# Altium PCB PCB_UAV_ESP32.pcbdoc
Units mm, origin at the board's own origin, x right, y up, seen from the top; angles counter-clockwise.
Board outline 81.53 x 88.63 mm, 2 copper layers (Top Layer, Bottom Layer); 49 components, 38 nets, 209 pads, 132 vias.
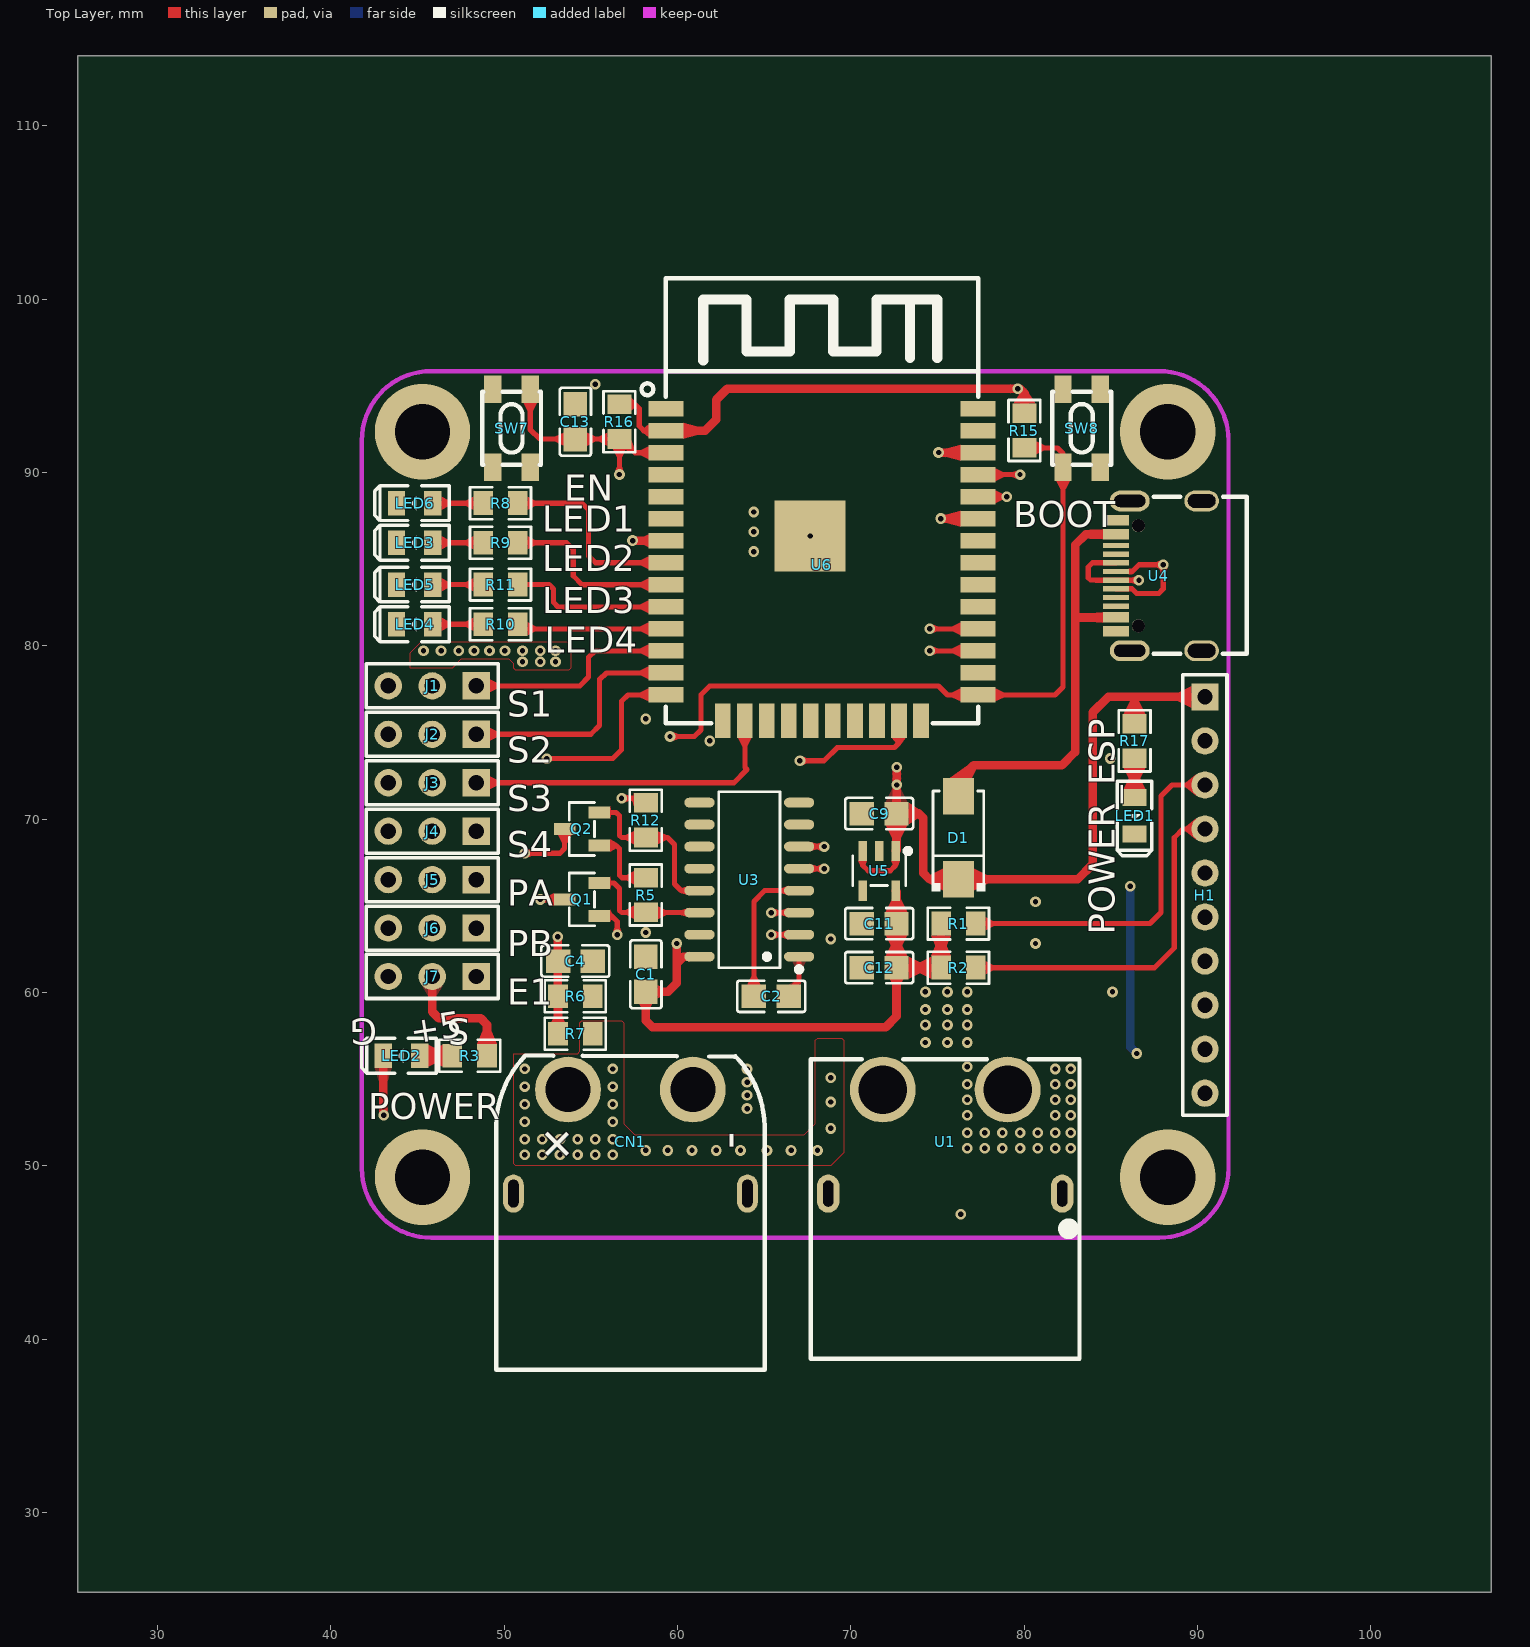
[diagram p0: Top Layer view]
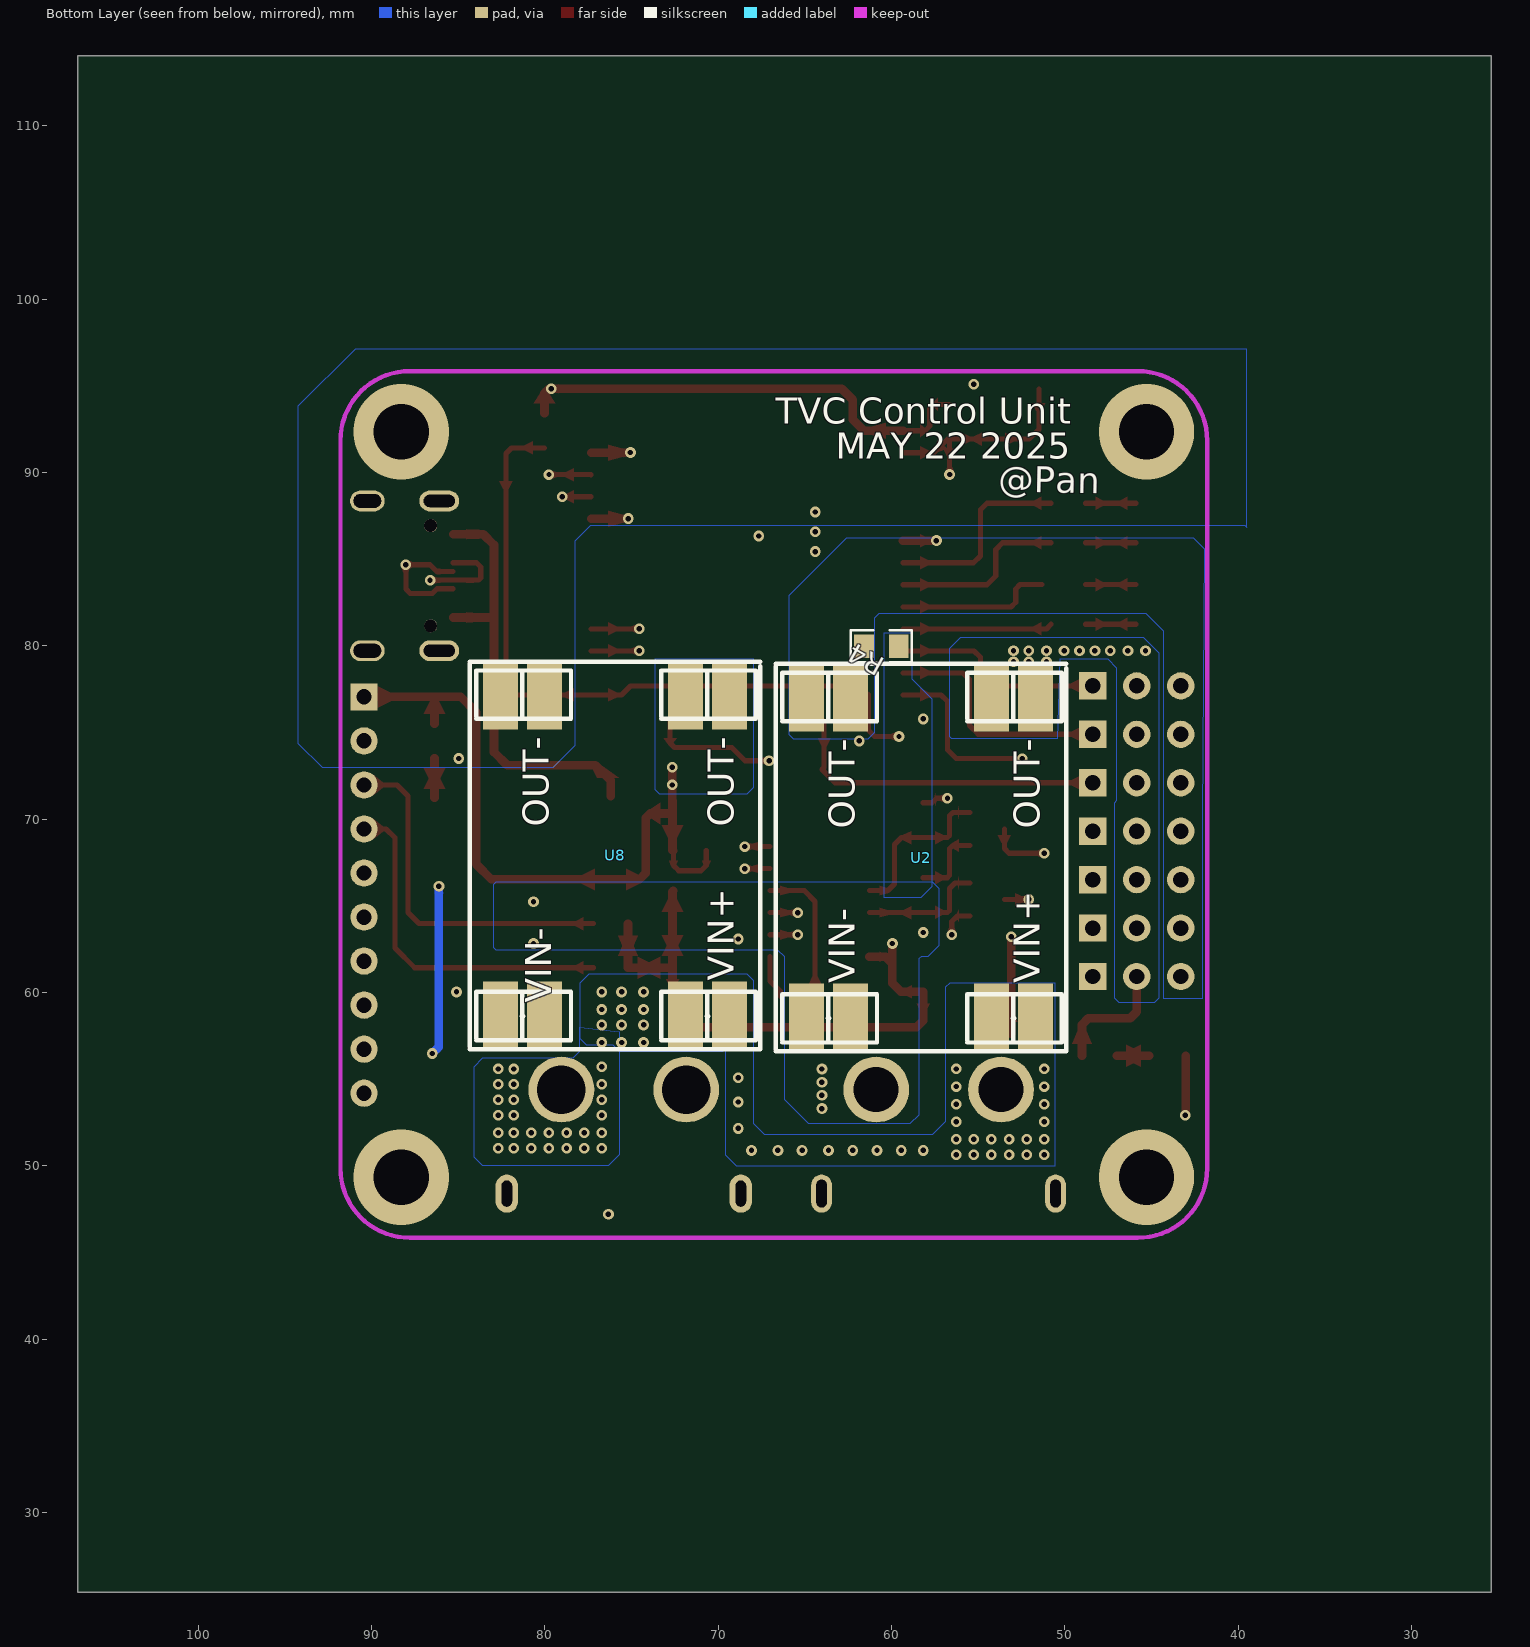
[diagram p1: Bottom Layer view, seen from below]

## Layer stack, top to bottom
Top Layer: signal copper (thickness not stored)
Dielectric: dielectric 0.32, FR-4, Dk 4.8
Bottom Layer: signal copper (thickness not stored)

## Board outline
106.934,25.4 25.4,25.4 25.4,114.029 106.934,114.029

## Components (designator, comment, footprint, x,y, rotation, side; value= is the part's Value field where it differs from the comment)
C1 "10UF" C0805 58.166,61.045 r270 top
C2 "1UF" C0805 65.405,59.775 r180 top
C4 "0.1u" C0805 54.102,61.807 r180 top
C9 "1UF" C0805 71.628,70.316 r180 top
C11 "1uF" C0805 71.628,63.966 r0 top
C12 "0.1uF" C0805 71.628,61.426 r0 top
C13 "1UF" C0805 54.102,92.922 r270 top
CN1 "XT60PW-M" CONN-TH_XT60PW-M 57.277,51.393 r90 top
D1 "SS14_C2766061" SMA_L4.3-W2.7-LS5.1-RD 76.2,68.919 r90 top
H1 "HDR-F-2.54_1x10" HDR-F-2.54_1X10 90.424,65.617 r270 top
J1 "HDR-M-2.54_1x3" HDR-M-2.54_1X3 45.847,77.682 r180 top
J2 "HDR-M-2.54_1x3" HDR-M-2.54_1X3 45.847,74.888 r180 top
J3 "HDR-M-2.54_1x3" HDR-M-2.54_1X3 45.847,72.094 r180 top
J4 "HDR-M-2.54_1x3" HDR-M-2.54_1X3 45.847,69.3 r180 top
J5 "HDR-M-2.54_1x3" HDR-M-2.54_1X3 45.847,66.506 r180 top
J6 "HDR-M-2.54_1x3" HDR-M-2.54_1X3 45.847,63.712 r180 top
J7 "HDR-M-2.54_1x3" HDR-M-2.54_1X3 45.847,60.918 r180 top
LED1 "LED-0805_R" LED0805_RED 86.36,70.189 r270 top
LED2 "LED-0805_R" LED0805_RED 44.069,56.346 r180 top
LED3 "LED-0805_R" LED0805_RED 44.831,85.937 r180 top
LED4 "LED-0805_R" LED0805_RED 44.831,81.238 r180 top
LED5 "LED-0805_R" LED0805_RED 44.831,83.524 r180 top
LED6 "LED-0805_R" LED0805_RED 44.831,88.223 r180 top
Q1 "S8050-G_C164892" SOT-23-3_L2.9-W1.3-P1.90-LS2.4-BR 54.483,65.363 r0 top
Q2 "S8050-G_C164892" SOT-23-3_L2.9-W1.3-P1.90-LS2.4-BR 54.483,69.427 r0 top
R1 "4.7k" R0805#1 76.2,63.966 r0 top
R2 "4.7k" R0805#1 76.2,61.426 r0 top
R3 "4.7k" R0805#1 48.006,56.346 r180 top
R4 "4.7k" R0805#2 60.579,79.968 r180 bottom
R5 "10k" R0805#1 58.166,65.617 r90 top
R6 "1k" R0805#1 54.102,59.775 r180 top
R7 "10k" R0805#1 54.102,57.616 r0 top
R8 "1k" R0805#1 49.784,88.223 r0 top
R9 "1k" R0805#1 49.784,85.937 r0 top
R10 "1k" R0805#1 49.784,81.238 r0 top
R11 "1k" R0805#1 49.784,83.524 r0 top
R12 "10k" R0805#1 58.166,69.935 r90 top
R15 "10k" R0805#1 80.01,92.414 r90 top
R16 "10k" R0805#1 56.642,92.922 r90 top
R17 "4.7k" R0805#1 86.36,74.507 r270 top
SW7 "3*4*2.5MM 贴片4脚" SW-SMD_4P-L4.2-W3.3-P2.15-LS5.1 50.419,92.541 r90 top
SW8 "3*4*2.5MM 贴片4脚" SW-SMD_4P-L4.2-W3.3-P2.15-LS5.1 83.312,92.541 r270 top
U1 "XT60PW-F_C428722" TH_2P-XT60PW-F 75.438,51.393 r180 top
U2 "MP1584EN" MP1584EN 51.689,58.505 r270 bottom
U3 "CH340C" SOP-16_L10.0-W3.9-P1.27-LS6.0-BL 64.135,66.506 r90 top
U4 "TYPE-C 16PF" USB-C-SMD_TYPE-C-USB-5 87.757,84.032 r90 top
U5 "RT9013-33GB" SOT-23-5_L3.0-W1.7-P0.95-LS2.8-BL 71.628,67.014 r180 top
U6 "ESP32-WROOM-32" WIFIM-SMD_ESP32-WROOM-32-N4 68.326,84.667 r0 top
U8 "MP1584EN" MP1584EN 69.342,58.632 r270 bottom

## Footprints (in the part's own frame and the unit in brackets; to place one, negate y for a bottom-side part, rotate by r counter-clockwise, add the part's x,y. Pads: shape width x height; smd on the part's side, far side on the other; paste and mask are expansions set on the pad)
C0805 [mm]
  rect 1.41x1.35 smd paste-100 mask+0.051: 1(-1,0) 2(1,0)
  silkscreen extent -1.96,-0.9 1.96,0.9
CONN-TH_XT60PW-M [mm]
  round 3.8 hole 2.6 paste+0 mask+0.05: 1(3,-3.6) 2(3,3.6)
  oval 2.2x1.2 hole 0.6 slot 1.6 at 0 deg paste+0 mask+0.05: 3(-3,6.75) 4(-3,-6.75)
  silkscreen extent -13.17,-7.75 4.96,7.75
HDR-F-2.54_1X10 [mil]
  rect 62x62 hole 35 paste+0 mask+2: 1(-450,0)
  round 62 hole 35 paste+0 mask+2: 2(-350,0) 3(-250,0) 4(-150,0) 5(-50,0) 6(50,0) 7(150,0) 8(250,0) 9(350,0) 10(450,0)
  silkscreen extent -500,-50 500,50
HDR-M-2.54_1X3 [mil]
  rect 62x62 hole 35 paste+0 mask+2: 1(-100,0)
  round 62 hole 35 paste+0 mask+2: 2(0,0) 3(100,0)
  silkscreen extent -150,-50 150,50
LED0805_RED [mm]
  rect 1x1.4 smd paste+0 mask+0.051: 1(-1.05,0) 2(1.05,0)
  silkscreen extent -2,-1 2.3,1
MP1584EN [mm]
  rect 4x2 smd paste+0 mask+0.051: 1(0,-13.208) 2(0,-10.668) 3(0,-2.54) 4(0,0) 5(-18.542,0) 6(-18.542,-2.54) 7(-18.542,-10.668) 8(-18.542,-13.208)
  silkscreen extent -20.45,-14.99 1.91,1.78
R0805#1 [mm]
  rect 1.133x1.377 smd paste-100 mask+0.051: 1(-1,0) 2(1,0)
  silkscreen extent -1.76,-0.92 1.76,0.92
R0805#2 [mm]
  rect 1.133x1.377 smd paste-100 mask+0.051: 1(1,0) 2(-1,0)
  silkscreen extent -1.76,-0.92 1.76,0.92
SMA_L4.3-W2.7-LS5.1-RD [mm]
  rect 2.1x1.8 smd paste+0 mask+0.051: 1(-2.4,0) 2(2.4,0)
  silkscreen extent -3.08,-1.54 2.7,1.54
SOP-16_L10.0-W3.9-P1.27-LS6.0-BL [mm]
  oval 0.56x1.745 smd paste+0 mask+0.051: 1(-4.445,-2.873) 2(-3.175,-2.873) 3(-1.905,-2.873) 4(-0.635,-2.873) 5(0.635,-2.873) 6(1.905,-2.873) 7(3.175,-2.873) 8(4.445,-2.873) 9(4.445,2.873) 10(3.175,2.873) 11(1.905,2.873) 12(0.635,2.873) 13(-0.635,2.873) 14(-1.905,2.873) 15(-3.175,2.873) 16(-4.445,2.873)
  silkscreen extent -5.33,-3.02 5.08,1.77
SOT-23-3_L2.9-W1.3-P1.90-LS2.4-BR [mm]
  rect 1.25x0.7 smd paste+0 mask+0.051: 1(1,-0.95) 2(1,0.95) 3(-1,0)
  silkscreen extent -0.73,-1.53 0.73,1.53
SOT-23-5_L3.0-W1.7-P0.95-LS2.8-BL [mm]
  rect 0.49x1.157 smd paste+0 mask+0.051: 1(-0.95,-1.154) 2(0,-1.154) 3(0.95,-1.154)
  rect 0.49x1.175 smd paste+0 mask+0.051: 4(0.95,1.154) 5(-0.95,1.154)
  silkscreen extent -1.8,-1.29 1.53,0.85
SW-SMD_4P-L4.2-W3.3-P2.15-LS5.1 [mm]
  rect 1.6x1 smd paste+0 mask+0.051: 1(-2.25,1.075) 2(2.25,1.075) 3(-2.25,-1.075) 4(2.25,-1.075)
  silkscreen extent -2.1,-1.7 2.1,1.7
TH_2P-XT60PW-F [mm]
  oval 1.3x2.2 hole 0.6 slot 1.5 at 90 deg paste+0 mask+0.05: 1(-6.75,3) 2(6.75,3)
  round 3.8 hole 2.8 paste+0 mask+0.05: 3(-3.6,-3) 4(3.6,-3)
  silkscreen extent -7.75,-4.75 7.75,12.52
USB-C-SMD_TYPE-C-USB-5 [mm]
  oval 1.2x2 hole 0.8 slot 1.6 at 90 deg paste+0 mask+0.051: 0(-4.32,-2.475) 0(4.32,-2.475)
  oval 1.2x2.3 hole 0.7 slot 1.8 at 90 deg paste+0 mask+0.051: 0(-4.32,1.675) 0(4.32,1.675)
  rect 0.3x1.5 smd paste-100 mask+0.05: A5(-1.25,2.475) A6(-0.25,2.475) A7(0.25,2.473) A8(-1.75,2.475) B5(1.75,2.475) B6(0.75,2.475) B7(-0.75,2.473) B8(1.25,2.475)
  rect 0.6x1.5 smd paste-100 mask+0.05: A9B4(-2.4,2.471) A9B4(2.4,2.475) B1A12(-3.2,2.471) B1A12(3.2,2.475)
  round 0.75 hole 0.75 unplated paste+0: ""(-2.89,1.175) ""(2.89,1.175)
  silkscreen extent -4.5,-5.08 4.56,0.3
WIFIM-SMD_ESP32-WROOM-32-N4 [mm]
  rect 2x0.9 smd paste+0 mask+0.05: 1(-9,9.005) 2(-9,7.735) 3(-9,6.465) 4(-9,5.195) 5(-9,3.925) 6(-9,2.655) 7(-9,1.385) 8(-9,0.115) 9(-9,-1.155) 10(-9,-2.425) 11(-9,-3.695) 12(-9,-4.965) 13(-9,-6.235) 14(-9,-7.505) 25(9,-7.505) 26(9,-6.235) 27(9,-4.965) 28(9,-3.695) 29(9,-2.425) 30(9,-1.155) 31(9,0.115) 32(9,1.385) 33(9,2.655) 34(9,3.925) 35(9,5.195) 36(9,6.465) 37(9,7.735) 38(9,9.005)
  rect 0.9x2 smd paste+0 mask+0.05: 15(-5.715,-9.005) 16(-4.445,-9.005) 17(-3.175,-9.005) 18(-1.905,-9.005) 19(-0.635,-9.005) 20(0.635,-9.005) 21(1.905,-9.005) 22(3.175,-9.005) 23(4.445,-9.005) 24(5.715,-9.005)
  rect 4.1x4.1 smd paste+0 mask+0.05: 39(-0.68,1.665)
  silkscreen extent -10.41,-9.13 9.02,16.54

## Free pads (board coordinates)
  round 5.5 hole 3.2 paste+0 mask+0.051: ""(45.283,49.342) ""(45.283,92.342) ""(88.283,49.342) ""(88.283,92.342)

## Via types
v1: diameter 0.62, hole 0.31, Top Layer to Bottom Layer, tented both sides, 73 vias
v2: diameter 0.61, hole 0.305, Top Layer to Bottom Layer, tented both sides, 55 vias
v3: diameter 5.5, hole 3.2, Top Layer to Bottom Layer, tented both sides, 4 vias

## Nets (pads, with @x,y where several pads share a name; then routed paths per layer and width w, separated by ;. In a path a pad name is that pad's centre, name@x,y a point inside that pad or via, vN(x,y) a via of type N, cw(c..) or ccw(c..) an arc to the next point about the centre after c; other vN are vias at no path point)
3V3: C1.2 C11.2 C12.2 R1.1 R2.1 R15.2 R16.2 U3.16 U5.5 U6.2 | length 113.1
  Top Layer w0.3: R16.2 57.546,93.922 57.785,93.684 57.785,92.668 58.052,92.401 U6.2@59.327,92.401
  Top Layer w0.5: U6.2@59.327,92.401 61.582,92.401 62.23,93.049 62.23,94.192 62.865,94.827 v1(79.629,94.827) 79.756,94.827 80.01,94.573 R15.2 ; v1(59.944,62.823) 59.944,61.68 ; U3.16 60.325,62.061 59.944,61.68 ; U5.5 72.629,65.81 C11.2 C12.2 R2.1 R1.1 ; C12.2 72.628,58.616 72.009,57.997 58.547,57.997 58.166,58.378 C1.2 59.451,60.044 59.944,60.537 59.944,61.68
  Mid-Layer 1 w0.5: v1(59.944,62.823) 59.944,70.57 60.706,71.332 69.977,71.332 70.612,71.967 70.612,74.126 71.12,74.634 78.232,74.634 78.74,75.142 78.74,87.207 78.105,87.842 78.105,94.319 78.613,94.827 v1(79.629,94.827)
+5VESP32: C9.1 D1.1 H1.1 R17.1 U5.1 U5.3 U8.5 U8.6 | length 40.9
  Top Layer w0.3: U5.3@70.678,68.167 70.678,67.328 70.993,67.014 72.263,67.014 72.578,67.328 U5.1@72.578,68.167
  Top Layer w0.5: U5.1@72.578,68.167 72.629,68.217 C9.1 ; v2(72.644,72.983) v2(72.644,71.967) C9.1 ; R17.1 86.36,77.047 ; H1.1 84.836,77.047 83.947,76.158 83.947,67.395 83.071,66.518 D1.1 74.536,66.518 74.168,66.887 74.168,70.062 73.914,70.316 C9.1
+5VSERVO: J1.2 J2.2 J3.2 J4.2 J5.2 J6.2 J7.2 R3.1 U2.5 U2.6 | length 7.3
  Top Layer w0.5: J7.2 45.847,58.886 46.228,58.505 48.641,58.505 49.006,58.14 R3.1
  other v1: 51.054,79.079 52.07,79.079 52.959,79.079 45.339,79.714 46.355,79.714 47.371,79.714 48.26,79.714 49.149,79.714 50.038,79.714 51.054,79.714 52.07,79.714 52.959,79.714
BATTERYADC: C4.2 R6.2 R7.1 U6.7 | length 40.7
  Top Layer w0.5: v1(53.086,63.204) R7.1 ; v1(57.404,86.064) U6.7@59.327,86.051
  Mid-Layer 2 w0.5: v1(53.086,63.204) 53.467,63.585 54.229,63.585 54.61,63.966 54.61,66.252 54.229,66.633 50.927,66.633 50.419,67.141 50.419,68.601 50.419,73.999 51.181,74.761 55.753,74.761 57.023,76.031 57.023,85.683 v1(57.404,86.064)
CH340_RXD: U3.3 U6.35 | length 45.2
  Top Layer w0.3: v2(65.405,64.601) U3.3 ; U6.35@77.325,89.861 v2(79.756,89.874)
  Mid-Layer 1 w0.3: v2(65.405,64.601) 64.897,64.601 64.643,64.855 64.643,69.3 65.024,69.681 79.629,69.681 80.264,70.316 80.264,89.366 v2(79.756,89.874)
CH340_TXD: U3.2 U6.34 | length 45
  Top Layer w0.3: v2(65.405,63.331) U3.2 ; U6.34 v2(78.994,88.592)
  Mid-Layer 1 w0.3: v2(65.405,63.331) 64.643,63.331 63.881,64.093 63.881,69.681 64.643,70.443 79.121,70.443 79.629,70.951 79.629,88.223 79.26,88.592 v2(78.994,88.592)
D1_2: D1.2 U4.A9B4 | length 25.2
  Top Layer w0.5: D1.2 76.2,72.221 77.089,73.11 82.169,73.11 82.931,73.872 82.931,85.81 83.553,86.432 U4.A9B4@85.283,86.432 ; 82.931,81.631 U4.A9B4@85.286,81.631
D+: U3.5 U4.A6 U4.B6 | length 42.2
  Top Layer w0.3: U3.5 v2(68.453,67.141) ; U4.B6@85.283,84.781 83.934,84.781 83.693,84.54 83.693,83.905 83.825,83.783 U4.A6 ; U4.A6 v2(86.614,83.778) U4.A6
  Mid-Layer 1 w0.254: v2(68.453,67.141) 68.885,67.572 79.807,67.572 81.28,69.046 81.28,81.873 81.28,82.889 81.28,83.905 81.28,84.078 81.396,84.194 86.451,84.194 v2@86.614,84.032
D-: U3.6 U4.A7 U4.B7 | length 44.2
  Top Layer w0.3: U3.6 v2(68.453,68.411) ; U4.B7 86.221,83.281 86.487,83.016 87.757,83.016 88.011,83.27 v2(88.011,84.667) 86.614,84.667 86.229,84.282 U4.A7
  Mid-Layer 1 w0.254: v2(68.453,68.411) 68.885,67.979 69.901,67.979 79.512,67.979 80.612,69.079 80.874,69.341 80.874,81.873 80.874,82.889 80.874,84.247 81.228,84.6 86.619,84.6 86.782,84.437 87.782,84.437 v2(88.011,84.667)
DTR#: Q2.2 R12.1 U3.13 | length 9.6
  Top Layer w0.3: Q2.2 56.454,70.376 56.642,70.189 56.642,69.046 56.784,68.934 58.166,68.934 59.421,68.934 59.817,68.538 59.817,66.252 60.198,65.871 U3.13
EN: C13.2 Q1.3 R16.1 SW7.4 U6.3 | length 46.4
  Top Layer w0.3: SW7.4 51.493,92.482 52.055,91.921 54.102,91.921 R16.1@56.642,91.921 ; v1(52.07,65.363) Q1.3 ; v1(56.642,89.874) R16.1@56.642,91.921 ; U6.3@59.327,91.131 57.544,91.131 56.754,91.921 R16.1@56.642,91.921
  Mid-Layer 2 w0.3: v1(52.07,65.363) 50.292,65.363 49.657,65.998 49.657,75.142 50.546,76.031 55.372,76.031 56.007,76.666 56.007,89.239 v1(56.642,89.874)
ESC: J7.1 U6.23 | length 36.4
  Top Layer w0.3: v1(67.056,73.364) 68.453,73.364 69.215,74.126 72.517,74.126 72.771,74.38 U6.23
  Mid-Layer 1 w0.3: J7.1 53.34,60.918 54.229,61.807 54.229,70.697 54.737,71.205 55.499,71.205 56.388,72.094 65.024,72.094 66.294,73.364 v1(67.056,73.364)
GND: C1.1 C2.1 C4.1 C9.2 C11.1 C12.1 C13.1 CN1.1 CN1.3 CN1.4 H1.2 LED1.2 LED2.2 LED3.2 LED4.2 LED5.2 LED6.2 pad. R4.1 R6.1 SW7.1 SW8.1 U1.1 U1.2 U1.4 U2.1 U2.2 U3.1 U4.0 U4.B1A12 U5.2 U6.1 U6.15 U6.38 U6.39 U8.1 U8.2 U8.7 U8.8 | length 15.8
  Top Layer w0.3: C2.1 66.406,60.062 67.008,60.664 U3.1
  Top Layer w0.5: LED2.2 43.017,52.952 v1(43.053,52.917)
  Bottom Layer w0.5: v1(86.106,66.125) 86.106,56.854 v1(86.487,56.473)
  other v1: 76.327,47.202 64.008,53.298 64.008,54.06 64.008,54.822 64.008,55.584 85.09,60.029 80.645,62.823 68.834,63.077 58.166,63.458 80.645,65.236 84.963,73.491 61.849,74.507 58.166,75.777 64.389,85.429 67.646,86.331 64.389,86.572 64.389,87.715 55.245,95.081
  other v3: 45.283,49.342 88.283,49.342 45.283,92.342 88.283,92.342
IO0: Q2.3 R15.1 SW8.4 U6.25 | length 58.8
  Top Layer w0.3: v1(51.181,68.03) 53.213,68.03 53.482,68.299 Q2.3 ; v1(59.563,74.761) 60.96,74.761 61.341,75.142 61.341,77.174 61.849,77.682 75.057,77.682 75.577,77.162 U6.25 ; U6.25@77.325,77.161 81.775,77.161 82.238,77.623 SW8.4 82.238,91.093 81.915,91.413 R15.1@80.01,91.413
  Mid-Layer 2 w0.3: v1(51.181,68.03) 51.181,71.713 51.689,72.221 57.023,72.221 57.912,73.11 57.912,74.253 58.42,74.761 v1(59.563,74.761)
LED1: R8.2 U6.8 | length 11.5
  Top Layer w0.3: R8.2 54.483,88.223 54.864,87.842 54.864,85.175 55.258,84.781 U6.8@59.327,84.781
LED2: R9.2 U6.9 | length 10.4
  Top Layer w0.3: R9.2 53.594,85.937 53.975,85.556 53.975,84.032 54.496,83.511 U6.9@59.327,83.511
LED2_1: LED2.1 R3.2 | length 1.9
  Top Layer w0.5: LED2.1 R3.2
LED3: R11.2 U6.10 | length 9
  Top Layer w0.3: R11.2@51.308,83.524 52.578,83.524 52.832,83.27 52.832,82.508 53.099,82.241 U6.10@59.327,82.241
LED3_1: LED3.1 R9.1 | length 2.9
  Top Layer w0.3: LED3.1 R9.1
LED4: R10.2 U6.11 | length 8.7
  Top Layer w0.3: R10.2 51.049,80.971 U6.11@59.327,80.971
LED4_1: LED4.1 R10.1 | length 2.9
  Top Layer w0.3: LED4.1 R10.1
LED5_1: LED5.1 R11.1 | length 2.9
  Top Layer w0.3: LED5.1 R11.1
LED6_1: LED6.1 R8.1 | length 2.9
  Top Layer w0.3: LED6.1 R8.1
PGND: J1.3 J2.3 J3.3 J4.3 J5.3 J6.3 J7.3 R4.2 U2.7 U2.8
PWMA: J5.1 U6.28 | length 41.5
  Top Layer w0.3: v1(74.549,80.984) U6.28@77.325,80.971
  Mid-Layer 1 w0.3: J5.1 51.181,66.506 51.943,67.268 51.943,72.221 52.451,72.729 54.229,72.729 55.118,73.618 58.547,73.618 ; 58.481,73.618 63.881,73.618 64.389,74.126 64.389,80.349 65.024,80.984 v1(74.549,80.984)
PWMB: J6.1 U6.27 | length 42.7
  Top Layer w0.3: v1(74.549,79.714) U6.27@77.325,79.701
  Mid-Layer 1 w0.3: J6.1 52.197,63.712 52.959,64.474 52.959,71.459 53.467,71.967 54.864,71.967 55.753,72.856 64.262,72.856 65.278,73.872 65.278,79.079 65.913,79.714 v1(74.549,79.714)
Q1_1: Q1.1 R12.2 | length 11.4
  Top Layer w0.3: Q1.1 56.195,64.413 56.515,64.093 v2(56.515,63.331) ; v2(56.769,71.205) 57.404,71.205 57.673,70.935 R12.2
  Mid-Layer 1 w0.3: v2(56.515,63.331) 56.515,70.951 v2(56.769,71.205)
R5_2: Q2.1 R5.2 | length 4.3
  Top Layer w0.3: Q2.1 56.449,68.477 56.642,68.284 56.642,66.76 56.784,66.617 R5.2
R17_2: LED1.1 R17.2 | length 2.3
  Top Layer w0.5: LED1.1 R17.2@86.36,73.506
RTS#: Q1.2 R5.1 U3.14 | length 7.2
  Top Layer w0.3: Q1.2 56.327,66.312 56.642,65.998 56.642,64.728 56.784,64.616 58.166,64.616 U3.14
SCL: H1.3 R1.2 U6.36 | length 56.5
  Top Layer w0.3: R1.2 87.249,63.966 87.884,64.601 87.884,71.332 88.519,71.967 H1.3
  Top Layer w0.5: v1(75.057,91.144) U6.36@77.325,91.131
  Mid-Layer 2 w0.5: v1(75.057,91.144) 82.55,91.144 83.312,90.382 83.312,72.602 83.947,71.967 H1.3
SDA: H1.4 R2.2 U6.33 | length 54.7
  Top Layer w0.3: R2.2 87.503,61.426 88.646,62.569 88.646,68.919 89.154,69.427 H1.4
  Top Layer w0.5: v1(75.184,87.334) U6.33@77.325,87.321
  Mid-Layer 2 w0.5: v1(75.184,87.334) 81.026,87.334 81.534,86.826 81.534,70.316 82.423,69.427 H1.4
SERVO1: J1.1 U6.12 | length 12.4
  Top Layer w0.3: J1.1 54.356,77.682 54.864,78.19 54.864,79.333 55.232,79.701 U6.12@59.327,79.701
SERVO2: J2.1 U6.13 | length 14
  Top Layer w0.3: J2.1 54.991,74.888 55.499,75.396 55.499,78.063 55.893,78.431 U6.13@59.327,78.431
SERVO3: J3.1 U6.16 | length 18.8
  Top Layer w0.3: J3.1 63.246,72.094 64.008,72.856 63.881,72.983 U6.16
SERVO4: J4.1 U6.14 | length 17.7
  Top Layer w0.3: v2(52.451,73.491) 56.261,73.491 56.769,73.999 56.769,76.793 57.138,77.162 U6.14
  Mid-Layer 1 w0.3: J4.1 50.673,69.3 51.181,69.808 51.181,72.983 51.689,73.491 v2(52.451,73.491)
U3_4: C2.2 U3.4 | length 8.3
  Top Layer w0.3: C2.2 64.404,65.251 65.024,65.871 U3.4
VIN: CN1.2 R7.2 U1.3 U2.3 U2.4 U8.3 U8.4
  other v1: 58.166,50.885 59.436,50.885 60.833,50.885 62.23,50.885 63.627,50.885 65.151,50.885 66.548,50.885 68.072,50.885 68.834,52.155 81.788,52.917 68.834,53.679 81.788,53.806 81.788,54.695 68.834,55.076 81.788,55.584 74.295,57.108 75.565,57.108 76.708,57.108 74.295,58.124 75.565,58.124 76.708,58.124 74.295,59.013 75.565,59.013 76.708,59.013 74.295,60.029 75.565,60.029 76.708,60.029
  other v2: 51.181,50.631 52.197,50.631 53.213,50.631 54.229,50.631 55.245,50.631 56.261,50.631 76.708,51.012 77.724,51.012 78.74,51.012 79.756,51.012 80.772,51.012 81.788,51.012 82.677,51.012 51.181,51.52 52.197,51.52 53.213,51.52 54.229,51.52 55.245,51.52 56.261,51.52 76.708,51.901 77.724,51.901 78.74,51.901 79.756,51.901 80.772,51.901 81.788,51.901 82.677,51.901 51.181,52.536 56.261,52.536 76.708,52.917 82.677,52.917 51.181,53.552 56.261,53.552 76.708,53.806 82.677,53.806 51.181,54.568 56.261,54.568 76.708,54.695 82.677,54.695 51.181,55.584 56.261,55.584 82.677,55.584 76.708,55.711
pads on no net: H1.5 H1.6 H1.7 H1.8 H1.9 H1.10 SW7.2 SW7.3 SW8.2 SW8.3 U3.7 U3.8 U3.9 U3.10 U3.11 U3.12 U3.15 U4. U4.A5 U4.A8 U4.B5 U4.B8 U5.4 U6.4 U6.5 U6.6 U6.17 U6.18 U6.19 U6.20 U6.21 U6.22 U6.24 U6.26 U6.29 U6.30 U6.31 U6.32 U6.37

## Polygon pours and split planes (outlines as drawn)
+5VESP32 on Bottom Layer (solid): 67.945,79.206 73.66,79.206 73.66,71.713 73.406,71.459 68.326,71.459 67.945,71.84
+5VSERVO on Bottom Layer (solid): 50.419,74.634 56.515,74.634 56.642,74.761 56.642,79.841 56.007,80.476 45.466,80.476 44.577,79.587 44.577,70.697 44.577,59.648 44.831,59.394 46.863,59.394 47.117,59.648 47.117,70.951 46.99,71.078 46.99,78.698 47.498,79.206 50.292,79.206
PGND on Bottom Layer (solid): 42.037,59.648 42.037,70.062 41.91,85.556 42.545,86.191 62.611,86.191 65.913,82.889 65.913,74.888 65.659,74.634 61.341,74.634 60.96,75.015 60.96,81.619 60.706,81.873 45.339,81.873 44.323,80.857 44.323,59.648 42.037,59.648
GND on Bottom Layer (solid): 39.497,97.113 90.932,97.113 94.234,93.811 94.234,74.38 92.837,72.983 79.502,72.983 78.232,74.253 78.232,86.064 77.343,86.953 39.624,86.953 39.497,86.826
GND on Bottom Layer (solid): 88.138,74.761 88.138,59.14 80.645,59.14 79.502,60.283 79.502,73.618 80.01,74.126
GND on Bottom Layer (solid): 58.42,57.616 58.42,52.917 58.928,52.409 64.77,52.409 66.167,53.806 66.167,62.061 66.548,62.442 82.804,62.442 82.931,62.569 82.931,66.252 82.804,66.379 57.658,66.379 57.277,65.998 57.277,62.696 57.912,62.061 58.293,62.061 58.42,61.934
VIN on Bottom Layer (solid): 50.546,60.537 56.642,60.537 56.896,60.283 56.896,52.536 57.658,51.774 67.31,51.774 67.945,52.409 67.945,60.664 68.326,61.045 77.47,61.045 77.978,60.537 77.978,57.362 77.597,56.981 76.073,56.981 75.692,56.6 69.723,56.6 69.596,56.727 69.596,50.631 68.961,49.996 50.546,49.996
VIN on Bottom Layer (solid): 75.692,57.743 75.692,50.631 76.327,49.996 83.566,49.996 84.074,50.504 84.074,55.711 83.566,56.219 78.359,56.219 77.978,56.6 77.978,57.997
GND on Bottom Layer (solid): 38.735,54.314 49.911,54.314 50.165,54.06 50.165,49.869 50.546,49.488 69.088,49.488 69.342,49.488 70.231,50.377 70.231,56.346 74.93,56.346 75.057,56.219 75.057,50.25 75.946,49.361 83.82,49.361 84.963,50.504 84.963,56.219 84.455,56.727 79.121,56.727 78.867,56.981 78.867,60.791 79.248,61.172 89.027,61.172 89.154,61.045 89.154,53.044 89.408,52.79 91.821,52.79 91.821,47.456 89.789,45.424 38.862,45.424 38.1,44.662
GND on Bottom Layer (solid): 58.801,80.73 60.452,80.73 60.452,65.49 58.293,65.49 57.658,66.125 57.658,76.92 58.801,78.063
VIN on Mid-Layer 2 (solid): 50.546,56.473 56.896,56.473 56.896,52.409 57.531,51.774 67.31,51.774 67.945,52.409 67.945,60.664 68.326,61.045 77.47,61.045 77.978,60.537 77.978,56.6 78.232,56.346 83.566,56.346 83.947,55.965 83.947,50.377 83.566,49.996 76.2,49.996 75.692,50.504 75.692,56.6 75.565,56.727 69.723,56.727 69.596,56.6 69.596,50.758 68.834,49.996 50.673,49.996 50.546,50.123
VIN on Mid-Layer 1 (solid): 50.546,56.473 56.896,56.473 56.896,52.409 57.531,51.774 67.31,51.774 67.945,52.409 67.945,60.664 68.326,61.045 77.47,61.045 77.978,60.537 77.978,56.6 78.232,56.346 83.566,56.346 83.947,55.965 83.947,50.377 83.566,49.996 76.2,49.996 75.692,50.504 75.692,56.6 75.565,56.727 69.723,56.727 69.596,56.6 69.596,50.758 68.834,49.996 50.673,49.996 50.546,50.123
+5VESP32 on Top Layer (solid): 71.882,73.364 73.66,73.364 73.66,69.935 73.279,69.554 72.009,69.554 71.882,69.681
+5VSERVO on Top Layer (solid): 44.577,78.952 46.99,78.952 46.99,59.648 46.609,59.648 45.847,59.648 44.577,59.648 44.577,78.952
+5VSERVO on Top Layer (solid): 44.577,78.698 44.577,79.587 45.212,80.222 53.594,80.222 53.848,79.968 53.848,78.698 53.721,78.571 50.673,78.571 50.546,78.698 50.546,78.952 50.292,79.206 47.498,79.206 46.99,78.698
GND on Top Layer (solid): 39.751,97.113 89.789,97.113 93.726,93.176 93.726,79.968 92.329,78.571 88.646,78.571 87.757,77.682 87.757,60.537 86.995,59.775 79.375,59.775 77.724,61.426 65.786,61.426 64.77,60.41 64.77,53.171 64.135,52.536 58.928,52.536 58.547,52.917 58.547,57.87 57.531,58.886 54.61,58.886 53.975,59.521 53.975,75.777 54.864,76.666 54.864,81.365 54.483,81.746 45.339,81.746 44.196,80.603 39.37,80.603
VIN on Top Layer (solid): 50.546,56.473 54.229,56.473 54.356,56.6 54.356,58.251 54.483,58.378 56.769,58.378 56.896,58.251 56.896,52.409 57.531,51.774 67.31,51.774 67.945,52.409 67.945,57.235 68.072,57.362 69.469,57.362 69.596,57.235 69.596,50.758 68.834,49.996 50.673,49.996 50.546,50.123

## Keep-outs
Keep-Out Layer:
  lines w0.254: 41.783,49.843 ccw(c45.783,49.843) 45.783,45.843 ; 41.783,91.843 cw(c45.783,91.843) 45.783,95.843 ; 87.783,45.843 ccw(c87.783,49.843) 91.783,49.843 ; 87.783,95.843 cw(c87.783,91.843) 91.783,91.843

## Other copper
Top Layer:
  region net SDA: 76.326,87.772 76.326,86.872 75.576,87.072 75.576,87.572
  region net SDA: 75.396,87.56 75.382,87.095 75.599,87.072 75.613,87.572
  region net SDA: 76.326,87.772 76.326,86.872 75.576,87.072 75.576,87.572
  region net SCL: 76.326,91.582 76.326,90.682 75.576,90.882 75.576,91.382
  region net SCL: 75.269,91.37 75.255,90.905 75.472,90.882 75.486,91.382
  region net IO0: 51.386,67.797 51.386,68.262 51.603,68.18 51.603,67.88
  region net IO0: 53.858,69.077 53.108,69.077 53.333,68.627 53.633,68.627
  region net BATTERYADC: 53.326,63.007 52.861,62.99 52.952,62.776 53.252,62.787
  region net BATTERYADC: 53.477,58.304 52.727,58.304 52.952,58.754 53.252,58.754
  region net BATTERYADC: 58.326,85.677 58.326,86.427 57.876,86.202 57.876,85.902
  region net BATTERYADC: 57.616,86.29 57.602,85.825 57.822,85.902 57.83,86.202
  region net EN: 56.267,91.355 57.017,91.355 56.792,90.905 56.492,90.905
  region net EN: 56.409,90.079 56.875,90.079 56.792,90.296 56.492,90.296
  region net EN: 52.275,65.13 52.275,65.595 52.492,65.513 52.492,65.213
  region net EN: 52.858,65.013 52.858,65.713 52.408,65.513 52.408,65.213
  region net IO0: 59.768,74.528 59.768,74.993 59.985,74.911 59.985,74.611
  region net IO0: 76.326,77.537 76.326,76.787 75.876,77.012 75.876,77.312
  region net ESC: 67.261,73.131 67.261,73.596 67.478,73.514 67.478,73.214
  region net ESC: 72.396,74.661 73.146,74.661 72.921,74.38 72.621,74.38
  region net PWMB: 76.326,80.077 76.326,79.327 75.876,79.552 75.876,79.852
  region net PWMB: 74.761,79.94 74.747,79.475 74.967,79.552 74.975,79.852
  region net PWMA: 76.326,81.347 76.326,80.597 75.876,80.822 75.876,81.122
  region net PWMA: 74.761,81.21 74.747,80.745 74.967,80.822 74.975,81.122
  region net 3V3: 60.326,92.852 60.326,91.952 61.076,92.152 61.076,92.652
  region net 3V3: 79.424,94.594 79.424,95.059 79.207,95.077 79.207,94.577
  region net 3V3: 79.385,93.98 80.635,93.98 80.26,94.573 79.76,94.573
  region net 3V3: 79.927,94.911 79.676,94.52 79.846,94.383 80.122,94.814
  region net 3V3: 59.711,62.617 60.177,62.617 60.094,62.4 59.794,62.4
  region net D1_2: 84.532,86.132 84.532,86.732 83.782,86.682 83.782,86.182
  region net D1_2: 75.723,72.369 76.973,72.369 77.266,72.933 76.735,73.11
  region net D1_2: 84.536,81.331 84.536,81.931 83.786,81.881 83.786,81.381
  region net +5VESP32: 75.3,65.893 75.3,67.143 74.55,66.768 74.55,66.268
  region net +5VESP32: 73.333,69.691 73.333,70.941 73.914,70.566 73.914,70.066
  region net +5VESP32: 72.003,69.641 73.253,69.641 72.878,68.891 72.378,68.891
  region net 3V3: 72.003,64.641 73.253,64.641 72.878,65.391 72.378,65.391
  region net 3V3: 72.003,62.101 73.253,62.101 72.878,62.851 72.378,62.851
  region net 3V3: 73.253,63.291 72.003,63.291 72.378,62.541 72.878,62.541
  region net 3V3: 74.634,62.051 74.634,60.801 73.884,61.176 73.884,61.676
  region net 3V3: 73.333,62.051 73.333,60.801 74.083,61.176 74.083,61.676
  region net 3V3: 74.634,63.277 75.766,63.277 75.45,62.527 74.95,62.527
  region net 3V3: 75.766,62.114 74.634,62.114 74.95,62.864 75.45,62.864
  region net +5VESP32: 77.1,67.143 77.1,65.893 77.85,66.268 77.85,66.768
  region net +5VESP32: 89.637,76.422 89.637,77.672 88.887,77.297 88.887,76.797
  region net +5VESP32: 86.985,76.073 85.735,76.073 86.11,76.823 86.61,76.823
  region net R17_2: 85.735,71.739 86.985,71.739 86.61,72.489 86.11,72.489
  region net R17_2: 86.985,72.94 85.735,72.94 86.11,72.19 86.61,72.19
  region net +5VESP32: 70.923,67.589 70.433,67.589 70.528,67.328 70.828,67.328
  region net +5VESP32: 72.823,67.589 72.333,67.589 72.428,67.328 72.728,67.328
  region net 3V3: 73.003,60.751 72.253,60.751 72.478,60.301 72.778,60.301
  region net 3V3: 58.841,60.42 58.841,59.67 59.291,59.895 59.291,60.195
  region net 3V3: 60.67,61.781 60.67,62.341 60.325,62.211 60.325,61.911
  region net 3V3: 58.541,59.339 57.791,59.339 58.016,58.889 58.316,58.889
  region net RTS#: 60.67,64.321 60.67,64.881 60.22,64.751 60.22,64.451
  region net RTS#: 58.855,64.226 58.855,64.976 59.305,64.751 59.305,64.451
  region net DTR#: 60.67,65.591 60.67,66.151 60.22,66.021 60.22,65.721
  region net DTR#: 58.855,68.56 58.855,69.31 59.305,69.085 59.305,68.785
  region net R5_2: 57.477,66.242 57.477,66.992 57.42,66.767 57.42,66.467
  region net DTR#: 56.108,70.726 56.108,70.026 56.134,70.226 56.134,70.526
  region net DTR#: 57.477,69.31 57.477,68.56 57.027,68.785 57.027,69.085
  region net R5_2: 56.108,68.827 56.108,68.127 56.449,68.327 56.449,68.627
  region net R5_2: 57.477,66.242 57.477,66.992 57.027,66.767 57.027,66.467
  region net RTS#: 56.108,66.662 56.108,65.962 56.134,66.162 56.134,66.462
  region net RTS#: 57.477,64.992 57.477,64.242 57.027,64.467 57.027,64.767
  region net Q1_1: 56.108,64.763 56.108,64.063 56.195,64.263 56.195,64.563
  region net Q1_1: 56.286,63.532 56.744,63.532 56.665,63.746 56.365,63.746
  region net Q1_1: 56.971,70.976 56.971,71.433 57.184,71.355 57.184,71.055
  region net Q1_1: 57.477,71.213 57.477,70.756 57.404,70.992 57.477,71.213
  region net Q1_1: 57.51,71.311 57.477,71.213 57.477,71.501 57.51,71.311
  region net D-: 68.251,68.182 68.251,68.639 68.038,68.561 68.038,68.261
  region net D-: 67.6,68.131 67.6,68.691 68.05,68.561 68.05,68.261
  region net D+: 68.251,66.912 68.251,67.369 68.038,67.291 68.038,66.991
  region net D+: 67.6,66.861 67.6,67.421 68.05,67.291 68.05,66.991
  region net D+: 84.532,84.632 84.532,84.932 84.082,84.932 84.082,84.632
  region net D+: 84.532,83.632 84.532,83.932 84.082,83.932 84.082,83.632
  region net D+: 86.415,84.008 86.41,83.551 86.197,83.632 86.2,83.932
  region net D+: 86.032,83.932 86.032,83.632 86.482,83.632 86.482,83.932
  region net D-: 86.034,84.432 86.034,84.132 86.229,84.132 86.229,84.432
  region net D-: 87.809,84.438 87.809,84.895 87.596,84.817 87.596,84.517
  region net D-: 86.034,83.431 86.034,83.131 86.221,83.131 86.221,83.431
  region net D-: 87.782,84.465 88.24,84.465 88.161,84.251 87.861,84.251
  region net D+: 86.415,84.008 86.41,83.551 86.197,83.632 86.2,83.932
  region net D+: 86.032,83.932 86.032,83.632 86.482,83.632 86.482,83.932
  region net U3_4: 64.03,60.45 64.78,60.45 64.555,60.9 64.255,60.9
  region net U3_4: 66.415,65.591 66.415,66.151 65.965,66.021 65.965,65.721
  region net CH340_RXD: 65.607,64.372 65.607,64.829 65.82,64.751 65.82,64.451
  region net CH340_RXD: 66.415,64.321 66.415,64.881 65.965,64.751 65.965,64.451
  region net CH340_TXD: 65.607,63.102 65.607,63.559 65.82,63.481 65.82,63.181
  region net CH340_TXD: 66.415,63.051 66.415,63.611 65.965,63.481 65.965,63.181
  region net CH340_RXD: 79.561,89.639 79.548,90.096 79.337,90.012 79.345,89.712
  region net CH340_RXD: 78.326,89.487 78.326,90.237 78.776,90.012 78.776,89.712
  region net CH340_TXD: 78.326,88.217 78.326,88.967 78.776,88.742 78.776,88.442
  region net IO0: 78.326,76.787 78.326,77.537 78.776,77.312 78.776,77.012
  region net IO0: 82.612,89.491 81.862,89.491 82.087,89.041 82.387,89.041
  region net IO0: 80.698,91.039 80.698,91.789 81.148,91.564 81.148,91.264
  region net IO0: 81.862,91.091 82.612,91.091 82.387,91.092 82.087,91.092
  region net LED6_1: 46.381,88.598 46.381,87.848 46.831,88.073 46.831,88.373
  region net LED6_1: 48.218,88.598 48.218,87.848 47.768,88.073 47.768,88.373
  region net LED3_1: 46.381,86.312 46.381,85.562 46.831,85.787 46.831,86.087
  region net LED3_1: 48.218,86.312 48.218,85.562 47.768,85.787 47.768,86.087
  region net LED5_1: 46.381,83.899 46.381,83.149 46.831,83.374 46.831,83.674
  region net LED5_1: 48.218,83.899 48.218,83.149 47.768,83.374 47.768,83.674
  region net LED4_1: 46.381,81.613 46.381,80.863 46.831,81.088 46.831,81.388
  region net LED4_1: 48.218,81.613 48.218,80.863 47.768,81.088 47.768,81.388
  region net LED1: 58.326,84.407 58.326,85.157 57.876,84.932 57.876,84.632
  region net LED1: 51.35,88.598 51.35,87.848 51.8,88.073 51.8,88.373
  region net LED2: 51.35,86.312 51.35,85.562 51.8,85.787 51.8,86.087
  region net LED2: 58.326,83.137 58.326,83.887 57.876,83.662 57.876,83.362
  region net LED3: 58.326,81.867 58.326,82.617 57.876,82.392 57.876,82.092
  region net LED3: 58.326,81.867 58.326,82.617 57.876,82.392 57.876,82.092
  region net LED4: 58.326,80.597 58.326,81.347 57.876,81.122 57.876,80.822
  region net LED4: 51.35,81.347 51.35,80.597 51.8,80.822 51.8,81.122
  region net EN: 51.869,93.99 51.119,93.99 51.344,93.54 51.644,93.54
  region net EN: 53.427,91.547 53.427,92.297 52.977,92.072 52.977,91.772
  region net EN: 55.953,92.297 55.953,91.547 55.503,91.772 55.503,92.072
  region net EN: 54.777,92.297 54.777,91.547 55.227,91.772 55.227,92.072
  region net EN: 55.953,92.297 55.953,91.547 55.503,91.772 55.503,92.072
  region net EN: 54.777,92.297 54.777,91.547 55.227,91.772 55.227,92.072
  region net EN: 57.331,91.857 56.773,91.355 57.268,91.195 57.491,91.396
  region net EN: 58.326,90.757 58.326,91.507 57.876,91.282 57.876,90.982
  region net 3V3: 57.331,94.297 57.331,93.547 57.547,93.772 57.547,94.072
  region net 3V3: 58.326,92.027 58.326,92.777 58.051,92.552 58.051,92.252
  region net SERVO1: 58.326,79.327 58.326,80.077 57.876,79.852 57.876,79.552
  region net SERVO1: 49.174,78.057 49.174,77.307 49.624,77.532 49.624,77.832
  region net SERVO2: 49.174,75.263 49.174,74.513 49.624,74.738 49.624,75.038
  region net SERVO2: 58.326,78.057 58.326,78.807 57.876,78.582 57.876,78.282
  region net SERVO3: 49.174,72.469 49.174,71.719 49.624,71.944 49.624,72.244
  region net SERVO3: 64.256,74.661 63.506,74.661 63.731,74.211 64.031,74.211
  region net SERVO4: 58.326,76.787 58.326,77.537 57.876,77.312 57.876,77.012
  region net SCL: 77.766,64.341 77.766,63.591 78.216,63.816 78.216,64.116
  region net SCL: 89.903,71.376 89.903,72.557 89.352,72.117 89.352,71.817
  region net SDA: 77.766,61.801 77.766,61.051 78.216,61.276 78.216,61.576
  region net SDA: 89.903,68.836 89.903,70.017 89.352,69.577 89.352,69.277
  region net LED2_1: 46.44,55.721 46.44,56.971 45.69,56.596 45.69,56.096
  region net LED2_1: 45.619,56.971 45.619,55.721 46.369,56.096 46.369,56.596
  region net +5VSERVO: 49.572,57.034 48.44,57.034 48.756,57.784 49.256,57.784
Mid-Layer 1:
  region net Q1_1: 56.286,63.532 56.744,63.532 56.665,63.746 56.365,63.746
  region net D-: 88.03,84.362 87.707,84.686 87.692,84.527 87.872,84.348
  region net CH340_RXD: 65.203,64.372 65.203,64.829 64.99,64.751 64.99,64.451
  region net CH340_RXD: 80.06,89.893 79.737,89.569 79.944,89.474 80.156,89.686
  region net CH340_TXD: 79.257,88.746 79.115,88.311 79.337,88.303 79.441,88.623
  region net CH340_TXD: 65.203,63.102 65.203,63.559 64.99,63.481 64.99,63.181
  region net SERVO4: 49.174,69.675 49.174,68.925 49.624,69.15 49.624,69.45
  region net SERVO4: 52.249,73.262 52.249,73.719 52.036,73.641 52.036,73.341
  region net 3V3: 59.711,63.028 60.177,63.028 60.194,63.245 59.694,63.245
  region net 3V3: 79.424,94.594 79.424,95.059 79.207,95.077 79.207,94.577
  region net PWMA: 74.344,80.751 74.344,81.216 74.127,81.134 74.127,80.834
  region net PWMA: 49.174,66.881 49.174,66.131 49.624,66.356 49.624,66.656
  region net PWMB: 49.174,64.087 49.174,63.337 49.624,63.562 49.624,63.862
  region net PWMB: 74.344,79.481 74.344,79.946 74.127,79.864 74.127,79.564
  region net ESC: 49.174,61.293 49.174,60.543 49.624,60.768 49.624,61.068
  region net D+: 68.757,67.121 68.434,67.445 68.657,67.524 68.836,67.344
Mid-Layer 2:
  region net BATTERYADC: 57.423,85.754 57.095,86.083 56.999,85.871 57.212,85.659
  region net IO0: 50.948,68.235 51.414,68.235 51.331,68.452 51.031,68.452
  region net IO0: 59.358,74.528 59.358,74.993 59.141,74.911 59.141,74.611
  region net EN: 51.865,65.13 51.865,65.595 51.648,65.513 51.648,65.213
  region net EN: 56.661,89.564 56.333,89.893 56.237,89.681 56.45,89.469
  region net SCL: 75.262,90.911 75.262,91.376 75.479,91.394 75.479,90.894
  region net SCL: 89.903,71.376 89.903,72.557 89.352,72.217 89.352,71.717
  region net SDA: 75.389,87.101 75.389,87.566 75.606,87.584 75.606,87.084
  region net SDA: 89.903,68.836 89.903,70.017 89.352,69.677 89.352,69.177

## Silkscreen, mask and mechanical layers (free items; w line width, h text height)
Top Overlay:
  text "EN" at 53.467,88.362 h1.5
  text "BOOT" at 79.375,86.838 h1.5
  text "LED1" at 52.205,86.584 h1.5
  text "LED2" at 52.205,84.298 h1.5
  text "LED3" at 52.205,81.885 h1.5
  text "LED4" at 52.332,79.599 h1.5
  text "S1" at 50.165,75.916 h1.5
  text "S2" at 50.165,73.249 h1.5
  text "S3" at 50.165,70.455 h1.5
  text "S4" at 50.165,67.788 h1.5
  text "PA" at 50.165,64.994 h1.5
  text "POWER_ESP" at 85.205,63.331 h1.5 r90
  text "PB" at 50.165,62.073 h1.5
  text "E1" at 50.165,59.279 h1.5
  text "G" at 42.672,58.493 h1.5 r180
  text "S" at 48.006,58.493 h1.5 r180
  text "+5" at 44.694,57.002 h1.5 r9
  text "POWER" at 42.164,52.675 h1.5
Bottom Overlay:
  text "TVC Control Unit" at 66.675,92.807 h1.5
  text "MAY 22 2025" at 63.212,90.798 h1.5
  text "@Pan" at 53.827,88.893 h1.5 r1

## Text inside footprints (layer, text, board x,y; h text height)
CN1: Top Overlay "-" at 62.357,51.949 h2.03 r270; Top Overlay "+" at 51.606,51.484 h2.03 r315
U2: Bottom Overlay "VIN+" at 51.435,60.537 h1.52 r270; Bottom Overlay "VIN-" at 62.103,60.537 h1.52 r270; Bottom Overlay "OUT-" at 62.103,69.427 h1.52 r270; Bottom Overlay "OUT-" at 51.435,69.427 h1.52 r270
U8: Bottom Overlay "VIN+" at 69.088,60.664 h1.52 r270; Bottom Overlay "VIN-" at 79.629,59.394 h1.52 r270; Bottom Overlay "OUT-" at 79.756,69.554 h1.52 r270; Bottom Overlay "OUT-" at 69.088,69.554 h1.52 r270